# Altium PCB UWB_CAN_R3.PcbDoc
Units mm, origin at the board's own origin, x right, y up, seen from the top; angles counter-clockwise.
Board outline 30 x 20.03 mm, 4 copper layers (Component Side, 3V3, Signal, Solder Side), stack 1.782 mm thick; 60 components, 51 nets, 432 pads, 150 vias.
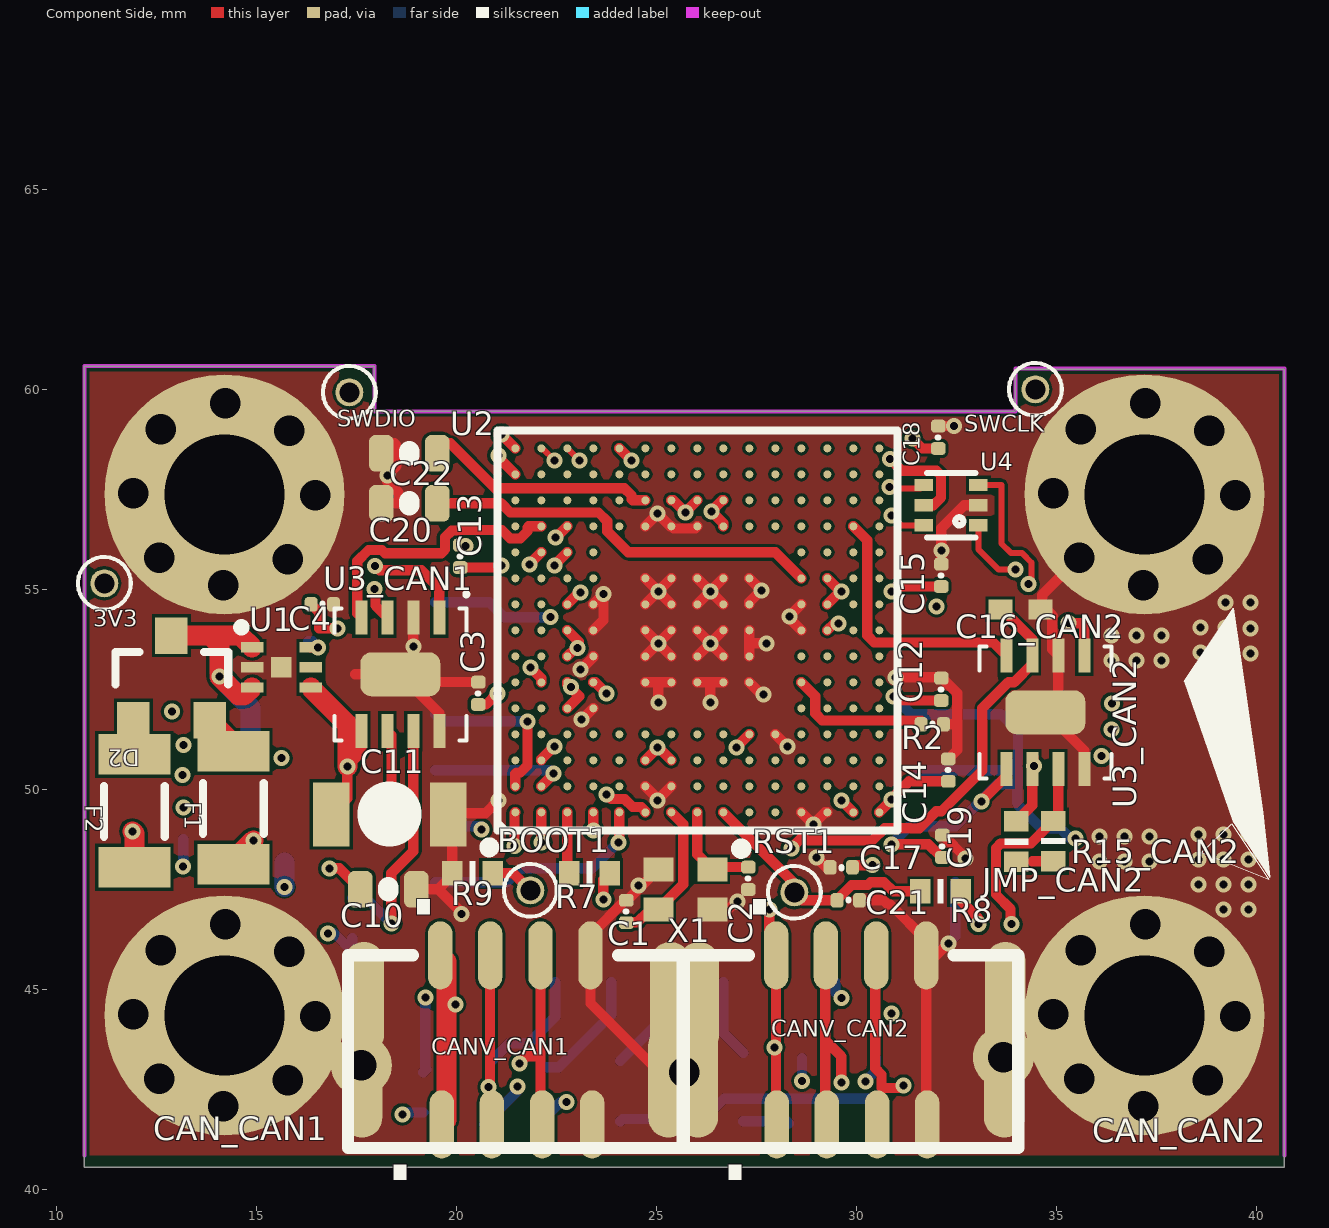
[diagram p0: Component Side view]
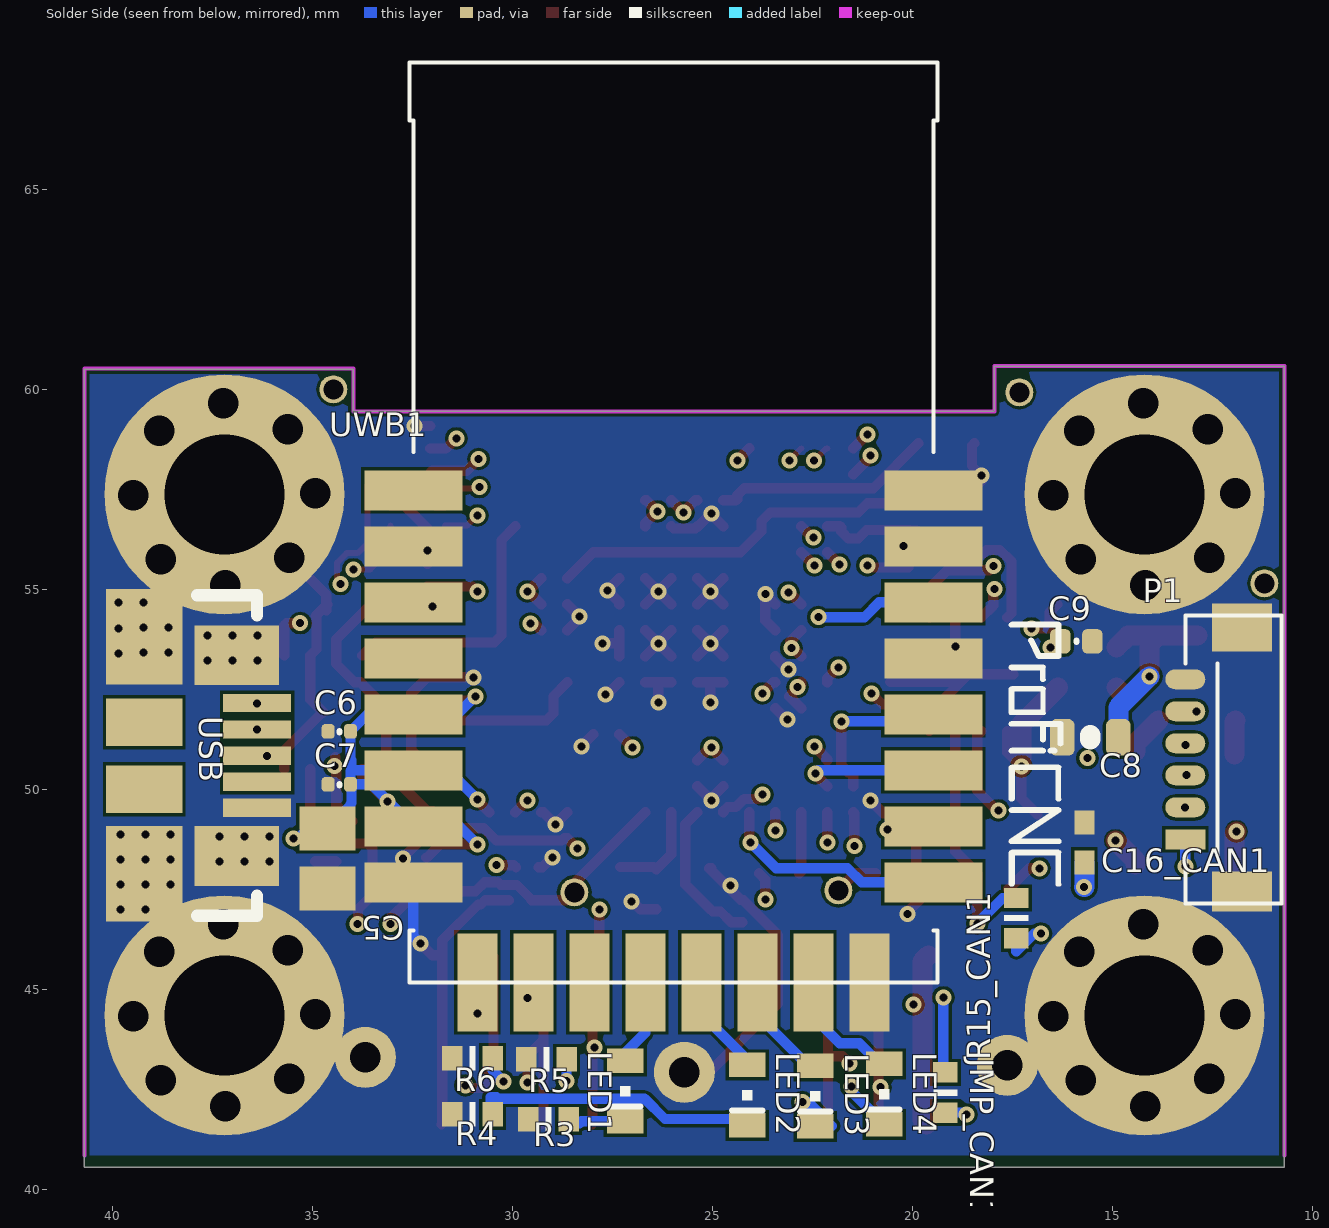
[diagram p1: Solder Side view, seen from below]
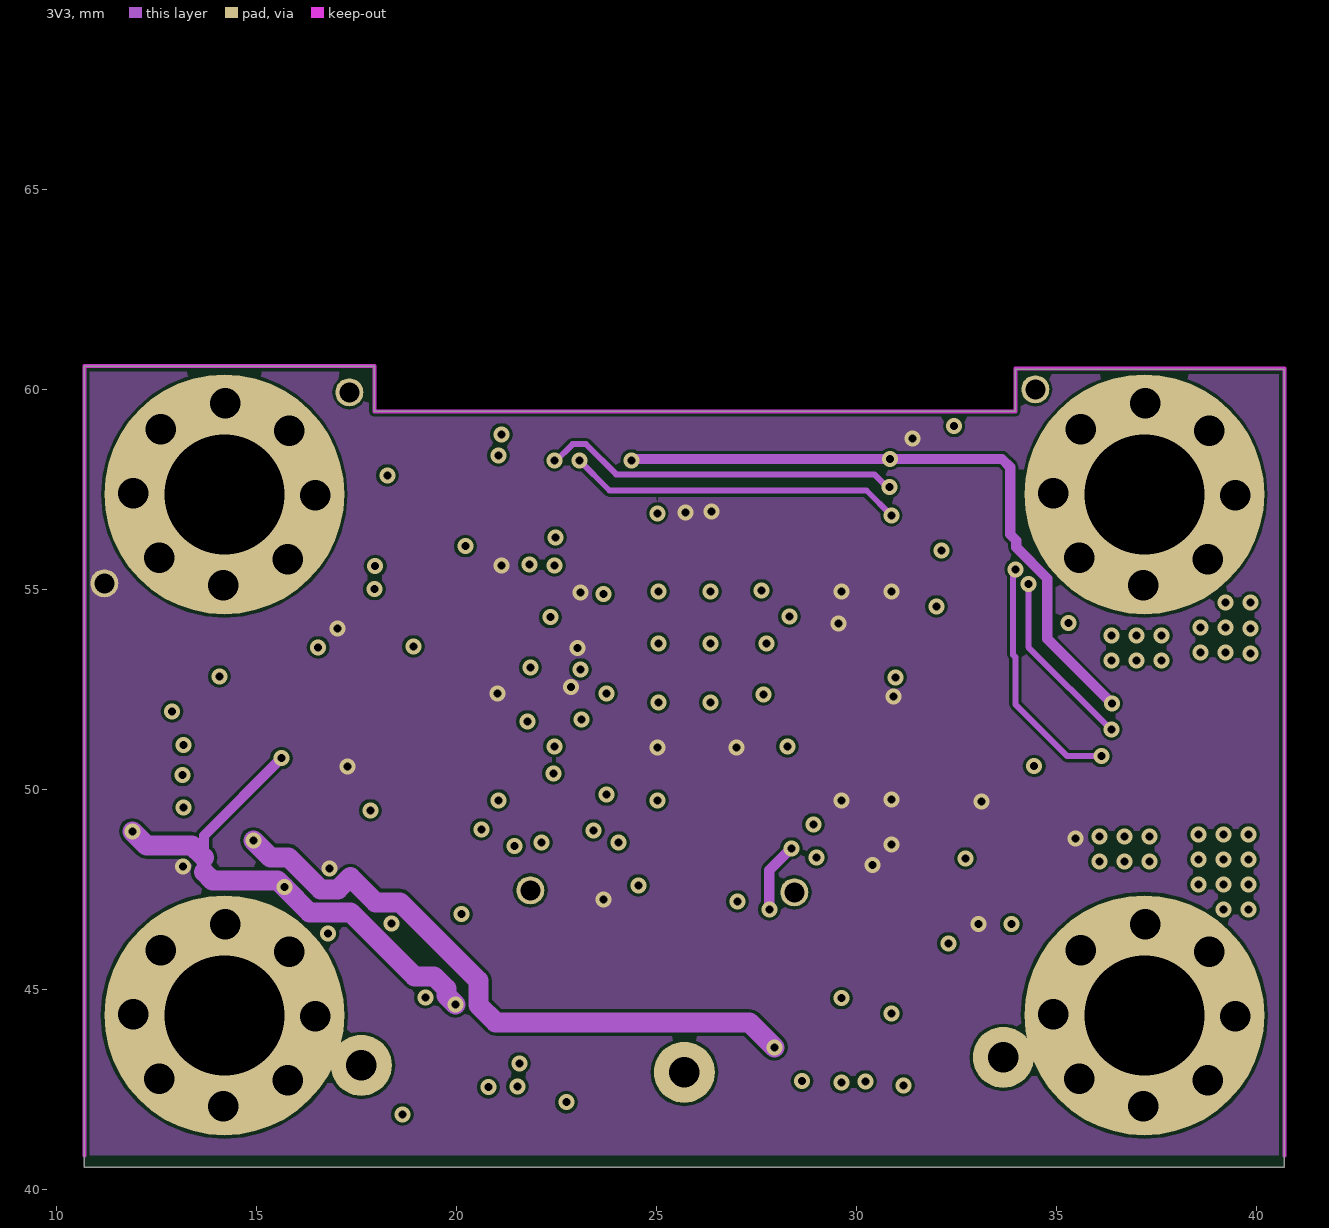
[diagram p2: 3V3]
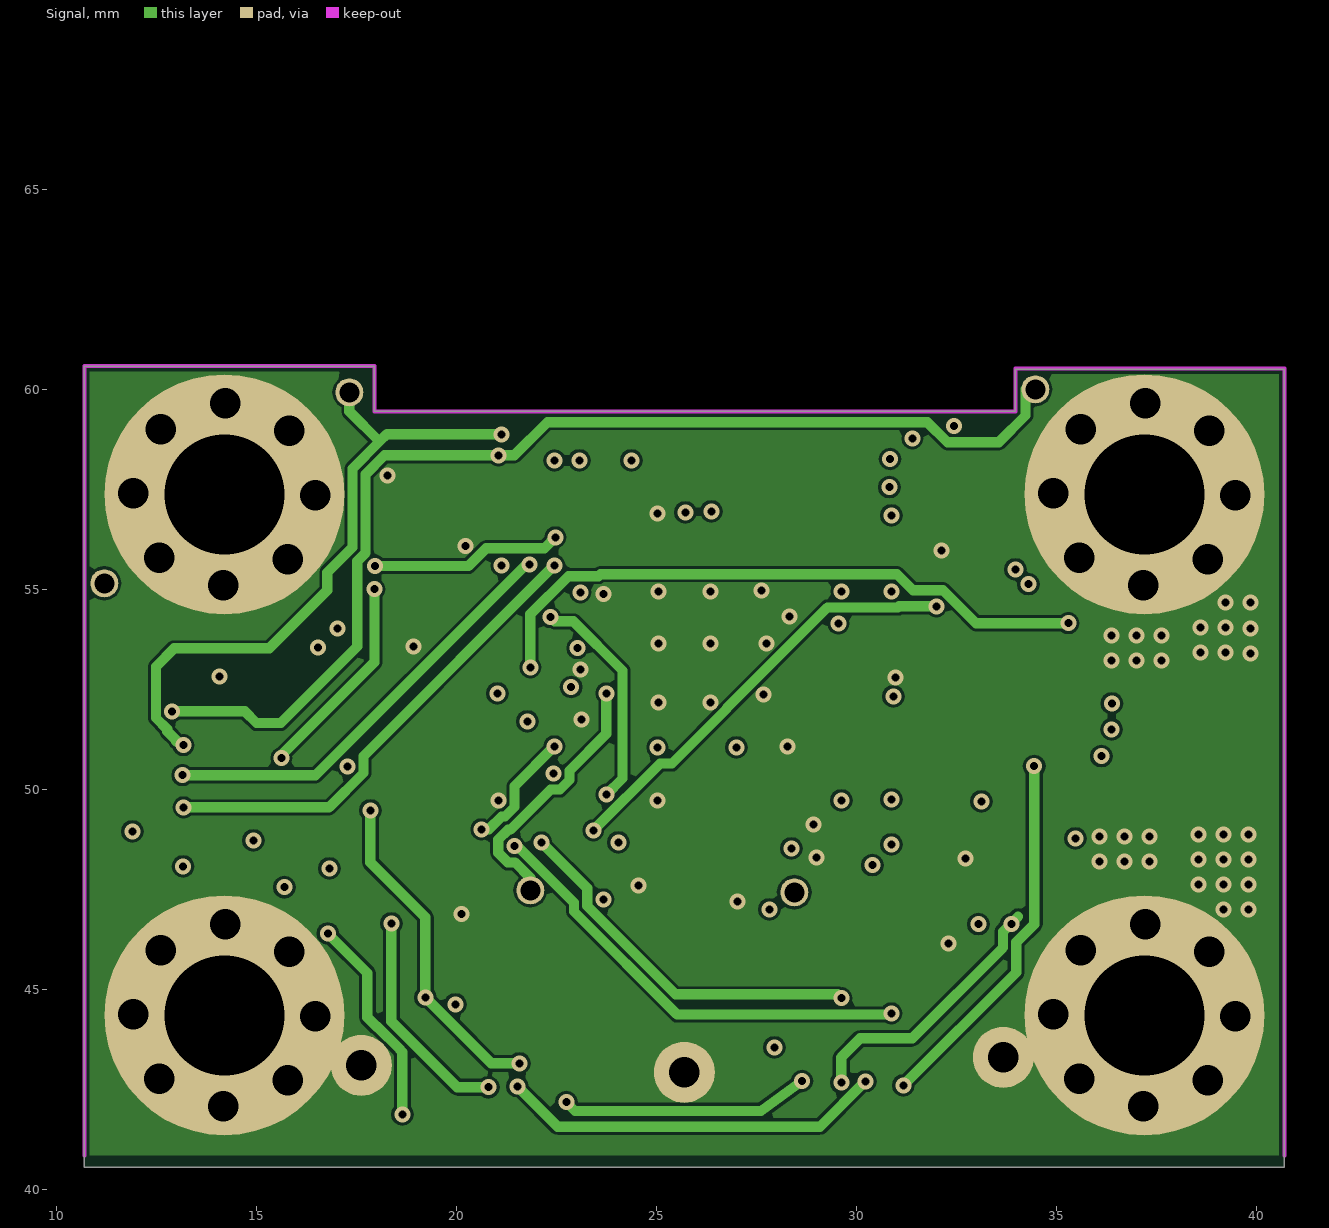
[diagram p3: Signal]
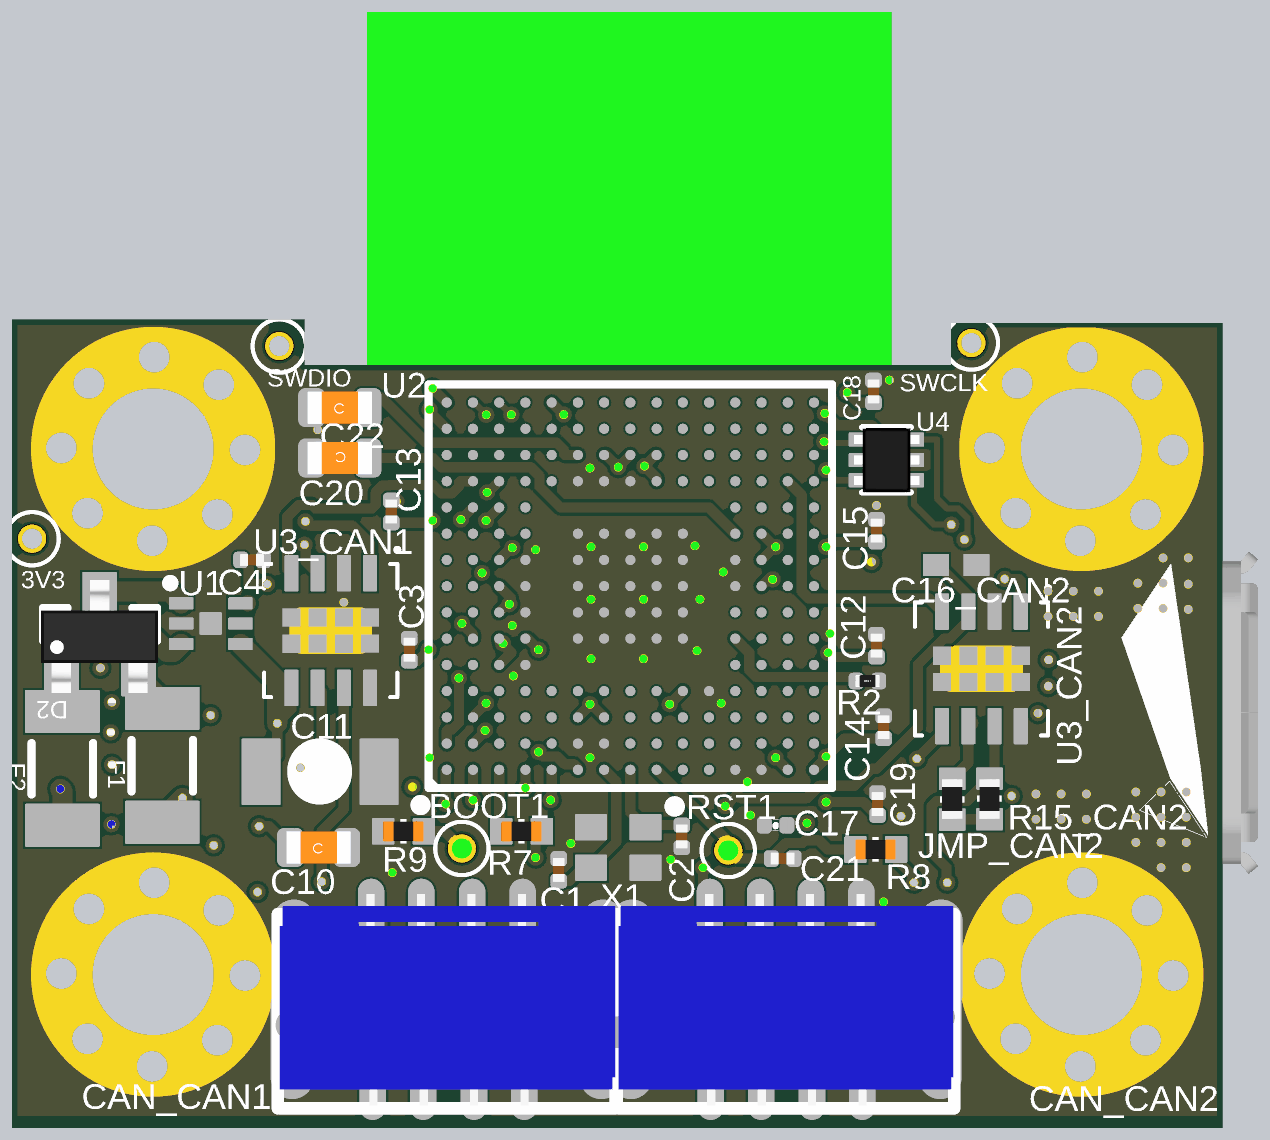
[diagram p4: 3D render of the assembled board from above, using the file's embedded part models]
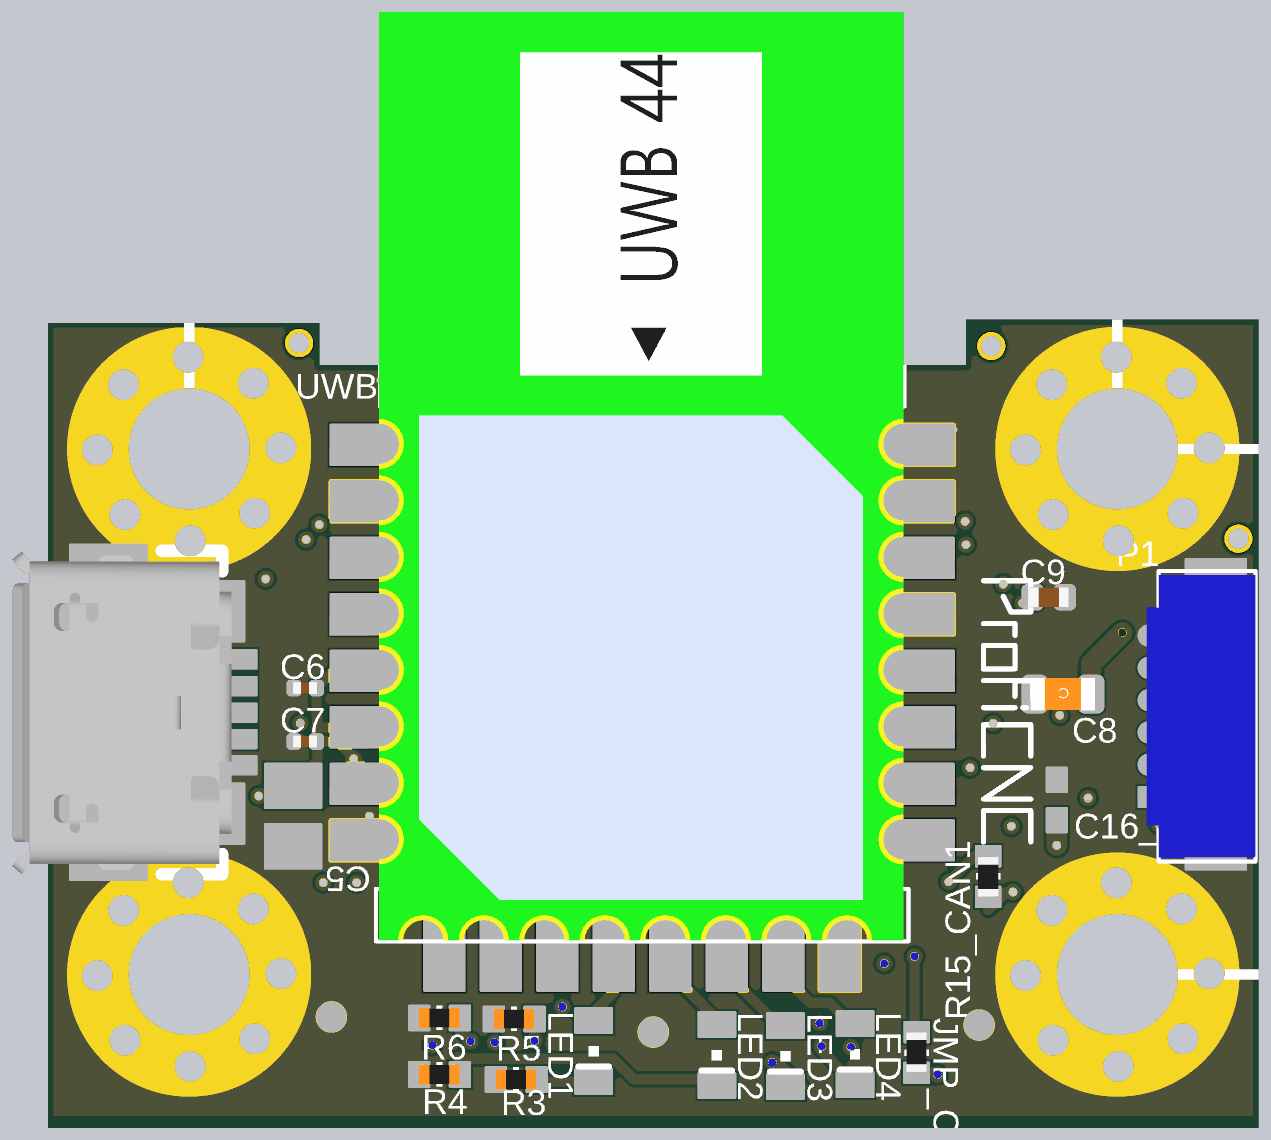
[diagram p5: 3D render of the assembled board from below, using the file's embedded part models]

## Layer stack, top to bottom
Top Solder: solder mask 0.0102, Solder Resist, Dk 3.5
Component Side: signal copper 0.0356
Dielectric 1: core 1, FR-4, Dk 4.2
3V3: signal copper 0.036
Dielectric2: dielectric 0.32, FR-4, Dk 4.8
Signal: signal copper 0.035
Dielectric3: dielectric 0.32, FR-4, Dk 4.8
Solder Side: signal copper 0.0356
Bottom Solder: solder mask 0.0102, Solder Resist, Dk 3.5

## Board outline
10.7,40.55 10.7,60.581 17.95,60.581 17.95,59.45 33.975,59.45 33.975,60.5 40.7,60.5 40.7,40.55

## Design rules (kind name [scope] priority, off if disabled: settings)
Clearance Clearance_1 [All] p1: gap=0.076 ignorepadtopadclearanceinfootprint=FALSE
Clearance mdPadVia [IsPad vs IsVia] p2 off: gap=0.15 ignorepadtopadclearanceinfootprint=FALSE except(0: Arc-Hole Track-Hole SMDPad-Hole THPad-Hole Via-Hole Fill-Hole Poly-Hole Region-Hole Text-Hole)
ComponentClearance ComponentClearance_1 [All] p1 off: gap=0 collisioncheckmode=3 verticalgap=0 showdistances=FALSE
DiffPairsRouting [All] p1: maxlimit=0.254 minlimit=0.254 mostfreqgap=0.254 toplayer_minwidth=0.15 toplayer_maxwidth=0.381 toplayer_prefwidth=0.15 midlayer1_minwidth=0.15 midlayer1_maxwidth=0.381 midlayer1_prefwidth=0.15 midlayer14_minwidth=0.15 midlayer14_maxwidth=0.381 midlayer14_prefwidth=0.15 bottomlayer_minwidth=0.15 bottomlayer_maxwidth=0.381 bottomlayer_prefwidth=0.15 maxuncoupledlength=12.7
HoleSize [All] p1: absolutevalues=TRUE maxlimit=5 minlimit=0.025 maxpercent=80.000 minpercent=20.000
HoleToHoleClearance [All] p1: gap=0.203 allowstackedmicrovias=TRUE
MatchedLengths [All] p1 off: tolerance=25.4 checknetsindiffpair=FALSE checkdiffpairvsdiffpair=TRUE checkxsignals=TRUE checkothers=TRUE
MinimumSolderMaskSliver [All] p1 off: minsoldermaskwidth=0.254
PasteMaskExpansion [All] p1: expansion=0.025
PolygonConnect ThermalVias [IsVia] p1: connectstyle=Direct reliefconductorwidth=0.254 reliefentries=4 polygonreliefangle="90 Angle" airgapwidth=0.254
PolygonConnect [All] p2: connectstyle=Direct reliefconductorwidth=0.254 reliefentries=4 polygonreliefangle="90 Angle" airgapwidth=0.254
RoutingVias 1-2 [InDrillLayerPair('Component Side - Signal Layer 1')] p1: holewidth=0.1 width=0.2 viastyle="Through Hole" minholewidth=0.1 minwidth=0.2 maxholewidth=0.1 maxwidth=0.2
RoutingVias 2-3 [InDrillLayerPair('Signal Layer 1 - Signal Layer 2')] p2: holewidth=0.1 width=0.2 viastyle="Through Hole" minholewidth=0.1 minwidth=0.2 maxholewidth=0.1 maxwidth=0.2
RoutingVias 3-4 [InDrillLayerPair('Signal Layer 2 - Solder Side')] p3: holewidth=0.1 width=0.2 viastyle="Through Hole" minholewidth=0.1 minwidth=0.2 maxholewidth=0.1 maxwidth=0.2
RoutingVias 1-4 [InDrillLayerPair('Component Side - Solder Side')] p4: holewidth=0.2 width=0.4 viastyle="Through Hole" minholewidth=0.2 minwidth=0.4 maxholewidth=0.2 maxwidth=0.4
SMDNeckDown SMDNeckDown1V8 [InNet('1V8')] p1 off: percent=70.000
SMDNeckDown SMDNeckDown2V8 [InNet('2V8')] p2 off: percent=70.000
SMDNeckDown 5VNeckdown [All] p3 off: percent=100.000
ShortCircuit normal_no_shorts [InPadClass('All Pads')] p1: allowed=FALSE
SilkToBoardRegionClearance [All] p1 off:
SilkToSilkClearance [All] p1 off: silktosilkclearance=0.254
SilkToSolderMaskClearance [IsPad] p1 off: minsilkscreentomaskgap=0.001 clearancetoexposedcopper=TRUE
SolderMaskExpansion [All] p1: expansion=0.025
Width 2V8 [InNet('1V8')] p1: maxlimit=0.254 minlimit=0.124 preferedwidth=0.254
Width 5V [InNet('Net3_1')] p2: maxlimit=0.254 minlimit=0.087 preferedwidth=0.254
Width 1V8 [InNet('2V8')] p3: maxlimit=0.254 minlimit=0.124 preferedwidth=0.254
Width [All] p4: maxlimit=0.5 minlimit=0.127 preferedwidth=0.254
20 further rules are at their usual default settings.

## Classes and differential pairs
channel class OMD_CAN_HORIZONTAL_dual: CAN1 CAN2
component class CAN2: C16_CAN2 CAN_CAN2 CANV_CAN2 JMP_CAN2 R15_CAN2 U3_CAN2
component class UWB_F4_CAN_UWB_layout_R2: USB
component class CAN1: C16_CAN1 CAN_CAN1 CANV_CAN1 JMP_CAN1 R15_CAN1 U3_CAN1
component class U_UWB_5V-3V3_LDO: C8 C9 C10 C11 D2 F1 F2 U1
component class U_OMD_UWB: C5 C6 C7 LED1 LED2 LED3 LED4 R3 R4 R5 R6 UWB1
component class U_UWB_F4_MCU: 3V3 BOOT1 C1 C1_2 C2 C2_2 C3 C3_2 C4 C12 C13 C14 C15 C17 C18 C19 C20 C21 C22 ICM-1_2 P1 R2 R7 R8 R9 RST1 SWCLK SWDIO U2 U4 X1
differential pair USB: +USB_P -USB_N
differential pair OTG_FS: +OTG_FS_P -OTG_FS_N

## Components (designator, comment, footprint, x,y, rotation, side; value= is the part's Value field where it differs from the comment)
3V3 "" PAD.04X.04#1 11.2,55.15 r90 top
BOOT1 "" PAD.04X.04#2 21.85,47.475 r90 top
C1 "8p" 0201-cap 24.25,46.945 r90 top
C2 "8p" 0201-cap 27.3,47.775 r90 top
C3 "0u1" 0201-cap 20.55,52.4 r90 top
C4 "0u1" 0201-cap 16.65,54.625 r0 top
C5 "GRM21BR60G107ME15L" C0805 34.625,48.275 r90 bottom value=100uF
C6 "1u" 0201-cap 34.325,51.45 r0 bottom
C7 "0u1" 0201-cap 34.325,50.125 r0 bottom
C8 "1u" 0603-CAP 15.55,51.3 r0 bottom
C9 "0.1u" 0402-CAP 15.9,53.7 r180 bottom
C10 "1u" 0603-CAP 18.3,47.5 r0 top
C11 "100u" 1206-CAP 18.325,49.375 r0 top
C12 "0u1" 0201-cap 32.125,52.5 r90 top
C13 "0u1" 0201-cap 20.1,55.825 r90 top
C14 "0u1" 0201-cap 32.3,50.48 r90 top
C15 "0u1" 0201-cap 32.125,55.35 r90 top
C16_CAN1 "Cap" CAPC1005L 15.7,48.675 r270 bottom value=1uF (schematic designator C16)
C16_CAN2 "Cap" CAPC1005L 34.1,54.5 r180 top value=1uF (schematic designator C16)
C17 "0u1" 0201-cap 29.625,48.05 r180 top
C18 "0u1" 0201-cap 32.05,58.8 r90 top
C19 "0u1" 0201-cap 32.15,48.575 r90 top
C20 "2u2" 0603-CAP 18.825,57.15 r180 top
C21 "0u1" 0201-cap 29.8,47.225 r0 top
C22 "2u2" 0603-CAP 18.825,58.4 r0 top
CAN_CAN1 "JST_GH_H4" JST_GH_H4 21.48,40.4 r180 top (schematic designator CAN)
CAN_CAN2 "JST_GH_H4" JST_GH_H4 29.875,40.4 r180 top (schematic designator CAN)
CANV_CAN1 "JST_GH_V4" JST_GH_V4 21.515,47.075 r0 top (schematic designator CANV)
CANV_CAN2 "JST_GH_V4" JST_GH_V4 29.89,47.075 r0 top (schematic designator CANV)
D2 "PMEG2005CT" SOT23-3 12.875,52.725 r0 top value=20V
F1 "0ZCA0035FF2G" PTC-1206 14.425,49.525 r90 top value=0.35A
F2 "0ZCA0035FF2G" PTC-1206 11.95,49.45 r90 top value=0.35A
JMP_CAN1 "solder" R0402 19.175,42.425 r270 bottom (schematic designator JMP)
JMP_CAN2 "solder" R0402 34,48.7 r270 top (schematic designator JMP)
LED1 "AMBER" 0603-LED 27.175,42.45 r90 bottom
LED2 "AMBER" 0603-LED 24.125,42.35 r90 bottom
LED3 "AMBER" 0603-LED 22.425,42.325 r90 bottom
LED4 "AMBER" 0603-LED 20.7,42.375 r90 bottom
P1 "JST_SUR_6" JST_SUR_H6 11.175,50.75 r90 bottom
R2 "10K" 0201-RES 31.9,51.625 r0 top
R3 "220R" 0402-RES 29.1,41.75 r180 bottom
R4 "220R" 0402-RES 31,41.875 r180 bottom
R5 "220R" 0402-RES 29.15,43.25 r180 bottom
R6 "220R" 0402-RES 31,43.275 r180 bottom
R7 "1K" 0402-RES 23.325,47.9 r0 top
R8 "10K" 0402-RES 32.1,47.45 r0 top
R9 "10K" 0402-RES 20.4,47.9 r0 top
R15_CAN1 "RES SMD 120 OHM 5% 1/16W 0402" R0402 17.4,46.775 r90 bottom value=120R (schematic designator R15)
R15_CAN2 "RES SMD 120 OHM 5% 1/16W 0402" R0402 34.925,48.7 r90 top value=120R (schematic designator R15)
RST1 "" PAD.04X.04#2 28.45,47.425 r90 top
SWCLK "" PAD.04X.04#1 34.475,60 r90 top
SWDIO "" PAD.04X.04#1 17.325,59.925 r90 top
U1 "MIC5353" MLF-6-1.6MM 15.625,53.05 r270 top
U2 "STM32F427IIH7" STM-UFBGA176+25 26.025,53.975 r90 top
U3_CAN1 "CAN" SON65P300X100_HS-9N 18.6,52.875 r270 top (schematic designator U3)
U3_CAN2 "CAN" SON65P300X100_HS-9N 34.725,51.925 r270 top (schematic designator U3)
U4 "NUF2042XV6" SOT563-6 32.375,57.1 r90 top
USB "47346-0001" MOLEX-47346-0001 39.2,50.837 r180 bottom
UWB1 "DWM1000" DWM1000 25.975,56.675 r180 bottom
X1 "Crystal Oscillator in SMD 1.6 x 1.2" OSCILLATOR-1.6x1.2 25.725,47.5 r180 top

## Footprints (in the part's own frame and the unit in brackets; to place one, negate y for a bottom-side part, rotate by r counter-clockwise, add the part's x,y. Pads: shape width x height; smd on the part's side, far side on the other; paste and mask are expansions set on the pad)
0201-cap [mm]
  rrect50% 0.32x0.36 smd mask+0: 1(-0.28,0) 2(0.28,0)
  silkscreen extent 0,-0.01 0,0.03, body extent -0.3,-0.15 0.3,0.15, height 0.3
0201-RES [mm]
  rrect50% 0.32x0.36 smd mask+0: 1(-0.28,0) 2(0.28,0)
  silkscreen extent 0,-0.01 0,0.03, body extent -0.3,-0.15 0.3,0.15, height 0.12
0402-CAP [mil]
  rrect50% 20x24 smd mask+0: 1(-15.75,0) 2(15.75,0)
  silkscreen extent 0,0 0,1, body extent -20,-10 20,10, height 20
0402-RES [mil] "0402-RES"
  rect 20x24 smd: 1(-19.68,0) 2(20,0)
  silkscreen extent -3,-12 3,12, body extent -20,-10 20,10, height 20
0603-CAP [mil] "0603-CAP"
  rrect50% 24x36 smd mask+0: 1(-27.56,0) 2(27.56,0)
  silkscreen extent 0,-2 0,2, body extent -31,-16 31,16, height 34
0603-LED [mil]
  rect 24x36 smd: A(30,0) C(-29.53,0)
  silkscreen extent -15,-15 5,15
1206-CAP [mil] "1206-CAP"
  rect 36x63 smd: 1(-57.09,0) 2(58,0)
  silkscreen extent 0,0 0,1
C0805 [mm] "Chip Capacitor, Body 2.0x1.3mm, IPC High Density"
  rect 1.1x1.4 smd: 1(-0.75,0) 2(0.75,0)
  body extent -1.1,-0.72 1.1,0.72, height 1.4
CAPC1005L [mm] "Chip Capacitor, Body 1.0x0.5mm, IPC High Density"
  rect 0.6x0.5 smd: 1(-0.5,0) 2(0.5,0)
  body extent -0.55,-0.3 0.55,0.3, height 0.6
DWM1000 [mm] "DWM1000"
  rect 2.45x1 smd mask+0.05: 1(-6.5,0.8) 2(-6.5,-0.6) 3(-6.5,-2) 4(-6.5,-3.4) 5(-6.5,-4.8) 6(-6.5,-6.2) 7(-6.5,-7.6) 8(-6.5,-9) 17(6.5,-9) 18(6.5,-7.6) 19(6.5,-6.2) 20(6.5,-4.8) 21(6.5,-3.4) 22(6.5,-2) 23(6.5,-0.6) 24(6.5,0.8)
  rect 1x2.45 smd mask+0.05: 9(-4.9,-11.5) 10(-3.5,-11.5) 11(-2.1,-11.5) 12(-0.7,-11.5) 13(0.7,-11.5) 14(2.1,-11.5) 15(3.5,-11.5) 16(4.9,-11.5)
  silkscreen extent -6.6,-11.5 6.6,11.5, body extent -6.52,-11.47 6.48,11.53
JST_GH_H4 [mil]
  rrect100% 24x67 smd: 1(74,-214.57) 2(25,-214.57) 3(-24.61,-214.57) 4(-73.82,-214.57)
  rrect100% 40x111 smd: GND(-150.59,-90.55) GND(151,-90.55)
  silkscreen extent -164,-215 165,-25, body extent -162,-234 163,-43, height 170
JST_GH_V4 [mil]
  rrect100% 24x67 smd: 1(-73.82,-214.57) 2(-24.61,-214.57) 3(25,-214.57) 4(74,-214.57)
  rrect100% 40x111 smd: GND(-150.59,-90.55) GND(151,-90.55)
  body extent -162,-235 163,-40, height 165
JST_SUR_H6 [mm]
  rect 0.5x1 smd: 1(-2,2)
  rrect100% 0.5x1 smd: 2(-1.2,2) 3(-0.4,2) 4(0.4,2) 5(1.2,2) 6(2,2)
  rect 1x1.5 smd: GND(-3.3,0.585)
  rect 1.2x1.5 smd: GND(3.3,0.585)
  silkscreen extent -3.6,-0.4 3.6,2, body extent -3.5,-0.4 3.5,2.3, height 1.7
MLF-6-1.6MM [mil] "MLF-6-1.6MM"
  rect 10x22 smd: 1(-19.68,-28.74) 2(0,-28.74) 3(20,-28.74) 4(20,29) 5(0,29) 6(-19.68,29)
  rect 20x20 smd: 2(0,0)
  silkscreen extent -41,-41 -37,-37
MOLEX-47346-0001 [mil]
  rect 67x18 smd: D+(111,0) D-(111,26) GND(111,-51.18) ID(111,-25.59) VBUS(111,52)
  rect 75x94 smd: GND1(0,117) GND4(0,-116.14)
  rect 83x59 smd: GND2(91,99) GND3(91,-98.43)
  rect 75x47 smd: GND5(0,-32.97) GND6(0,33)
  silkscreen extent 52,-157 111,158, body extent -94,-157 120,157, height 107
OSCILLATOR-1.6x1.2 [mm] "OSCILLATOR-1.6x1.2"
  rect 0.75x0.6 smd: 1(-0.675,-0.5) 2(0.675,-0.5) 3(0.675,0.5) 4(-0.675,0.5)
  silkscreen extent -1.5,-1.12 -1.3,-0.91
PAD.04X.04#1 [mm]
  rrect100% 0.7x0.7 hole 0.5 paste-2: 1(0,0)
  silkscreen extent -0.66,-0.66 0.66,0.66
PAD.04X.04#2 [mm]
  rrect100% 0.7x0.7 hole 0.5 paste-2 mask+0.025: 1(0,0)
  silkscreen extent -0.66,-0.66 0.66,0.66
PTC-1206 [mil] "PTC-1206"
  rect 40x71 smd: 1(-55.12,0) 2(56,0)
  silkscreen extent -25,-30 25,30, body extent -60,-30 65,30, height 20
R0402 [mil]
  rect 20x24 smd: 1(-19.69,0) 2(20,0)
  silkscreen extent -3,-12 3,12, body extent -20,-10 20,10, height 12
SON65P300X100_HS-9N [mm] "SON, 8-Leads, Body 3.00x3.00mm, Pitch 0.65mm, Thermal Pad 2.40x1.59mm, IPC Medium Density"
  rect 0.85x0.3 smd: 1(-1.42,0.975) 2(-1.42,0.325) 3(-1.42,-0.325) 4(-1.42,-0.975) 5(1.42,-0.975) 6(1.42,-0.325) 7(1.42,0.325) 8(1.42,0.975)
  rrect50% 1.1x2 smd paste-0.795: 2(0,0)
  silkscreen extent -2.05,-1.65 1.65,1.7, body extent -1.55,-1.55 1.55,1.55, height 1
SOT23-3 [mil] "SOT23-3"
  rect 32x36 smd: 1(-37.4,-39.37) 2(38,-39.37) 3(0,44)
  silkscreen extent -55,-4 56,28, body extent -57,-55 57,55, height 51
SOT563-6 [mil] "SOT563-6"
  rect 12x18 smd: 1(-19.68,-26.57) 2(0,-26.57) 3(20,-26.57) 4(20,27) 5(0,27) 6(-19.68,27)
  silkscreen extent -31,-24 32,24, body extent -32,-32 31,32, height 23
STM-UFBGA176+25 [mm] "BGA, 201-Balls, Body 10x10mm, Pitch 0.65mm"
  round 0.2 smd: A1(-4.55,4.55) A2(-3.9,4.55) A3(-3.25,4.55) A4(-2.6,4.55) A5(-1.95,4.55) A6(-1.3,4.55) A7(-0.65,4.55) A8(0,4.55) A9(0.65,4.55) A10(1.3,4.55) A11(1.95,4.55) A12(2.6,4.55) A13(3.25,4.55) A14(3.9,4.55) A15(4.55,4.55) B1(-4.55,3.9) B2(-3.9,3.9) B3(-3.25,3.9) B4(-2.6,3.9) B5(-1.95,3.9) B6(-1.3,3.9) B7(-0.65,3.9) B8(0,3.9) B9(0.65,3.9) B10(1.3,3.9) B11(1.95,3.9) B12(2.6,3.9) B13(3.25,3.9) B14(3.9,3.9) B15(4.55,3.9) C1(-4.55,3.25) C2(-3.9,3.25) C3(-3.25,3.25) C4(-2.6,3.25) C5(-1.95,3.25) C6(-1.3,3.25) C7(-0.65,3.25) C8(0,3.25) C9(0.65,3.25) C10(1.3,3.25) C11(1.95,3.25) C12(2.6,3.25) C13(3.25,3.25) C14(3.9,3.25) C15(4.55,3.25) D1(-4.55,2.6) D2(-3.9,2.6) D3(-3.25,2.6) D4(-2.6,2.6) D5(-1.95,2.6) D6(-1.3,2.6) D7(-0.65,2.6) D8(0,2.6) D9(0.65,2.6) D10(1.3,2.6) D11(1.95,2.6) D12(2.6,2.6) D13(3.25,2.6) D14(3.9,2.6) D15(4.55,2.6) E1(-4.55,1.95) E2(-3.9,1.95) E3(-3.25,1.95) E4(-2.6,1.95) E12(2.6,1.95) E13(3.25,1.95) E14(3.9,1.95) E15(4.55,1.95) F1(-4.55,1.3) F2(-3.9,1.3) F3(-3.25,1.3) F4(-2.6,1.3) F6(-1.3,1.3) F7(-0.65,1.3) F8(0,1.3) F9(0.65,1.3) F10(1.3,1.3) F12(2.6,1.3) F13(3.25,1.3) F14(3.9,1.3) F15(4.55,1.3) G1(-4.55,0.65) G2(-3.9,0.65) G3(-3.25,0.65) G4(-2.6,0.65) G6(-1.3,0.65) G7(-0.65,0.65) G8(0,0.65) G9(0.65,0.65) G10(1.3,0.65) G12(2.6,0.65) G13(3.25,0.65) G14(3.9,0.65) G15(4.55,0.65) H1(-4.55,0) H2(-3.9,0) H3(-3.25,0) H4(-2.6,0) H6(-1.3,0) H7(-0.65,0) H8(0,0) H9(0.65,0) H10(1.3,0) H12(2.6,0) H13(3.25,0) H14(3.9,0) H15(4.55,0) J1(-4.55,-0.65) J2(-3.9,-0.65) J3(-3.25,-0.65) J4(-2.6,-0.65) J6(-1.3,-0.65) J7(-0.65,-0.65) J8(0,-0.65) J9(0.65,-0.65) J10(1.3,-0.65) J12(2.6,-0.65) J13(3.25,-0.65) J14(3.9,-0.65) J15(4.55,-0.65) K1(-4.55,-1.3) K2(-3.9,-1.3) K3(-3.25,-1.3) K4(-2.6,-1.3) K6(-1.3,-1.3) K7(-0.65,-1.3) K8(0,-1.3) K9(0.65,-1.3) K10(1.3,-1.3) K12(2.6,-1.3) K13(3.25,-1.3) K14(3.9,-1.3) K15(4.55,-1.3) L1(-4.55,-1.95) L2(-3.9,-1.95) L3(-3.25,-1.95) L4(-2.6,-1.95) L12(2.6,-1.95) L13(3.25,-1.95) L14(3.9,-1.95) L15(4.55,-1.95) M1(-4.55,-2.6) M2(-3.9,-2.6) M3(-3.25,-2.6) M4(-2.6,-2.6) M5(-1.95,-2.6) M6(-1.3,-2.6) M7(-0.65,-2.6) M8(0,-2.6) M9(0.65,-2.6) M10(1.3,-2.6) M11(1.95,-2.6) M12(2.6,-2.6) M13(3.25,-2.6) M14(3.9,-2.6) M15(4.55,-2.6) N1(-4.55,-3.25) N2(-3.9,-3.25) N3(-3.25,-3.25) N4(-2.6,-3.25) N5(-1.95,-3.25) N6(-1.3,-3.25) N7(-0.65,-3.25) N8(0,-3.25) N9(0.65,-3.25) N10(1.3,-3.25) N11(1.95,-3.25) N12(2.6,-3.25) N13(3.25,-3.25) N14(3.9,-3.25) N15(4.55,-3.25) P1(-4.55,-3.9) P2(-3.9,-3.9) P3(-3.25,-3.9) P4(-2.6,-3.9) P5(-1.95,-3.9) P6(-1.3,-3.9) P7(-0.65,-3.9) P8(0,-3.9) P9(0.65,-3.9) P10(1.3,-3.9) P11(1.95,-3.9) P12(2.6,-3.9) P13(3.25,-3.9) P14(3.9,-3.9) P15(4.55,-3.9) R1(-4.55,-4.55) R2(-3.9,-4.55) R3(-3.25,-4.55) R4(-2.6,-4.55) R5(-1.95,-4.55) R6(-1.3,-4.55) R7(-0.65,-4.55) R8(0,-4.55) R9(0.65,-4.55) R10(1.3,-4.55) R11(1.95,-4.55) R12(2.6,-4.55) R13(3.25,-4.55) R14(3.9,-4.55) R15(4.55,-4.55)
  silkscreen extent -5.55,-5 5,5.32, body extent -5,-5 5,5, height 0.6

## Part data
3V3 BOOT1 RST1 SWCLK SWDIO: library part PAD.04, Manufacturer 1=DNF, Supplier 1=DNF, Supplier Part Number 1=DNF, Supplier Unit Price 1=0
C1 C2: library part CAP0402, "CAP CER 8PF 50V NP0 0201", Supplier Part Number 1=490-13331-1-ND, Supplier 1=Digi-Key
C3 C4 C12 C13 C14 C15 C17 C18 C19 C21: library part CAP0402, "CAP CER 0.1UF 6V Y5V 0201", Supplier Part Number 1=490-10404-2-ND, Supplier 1=Digi-Key
C5: library part Capacitor, Supplier Part Number 1=490-10510-1-ND, Supplier 1=Digi-Key
C6: library part CAP0603, "CAP CER 1UF 6.3V X5R 0201", Supplier Part Number 1=490-7229-2-ND, Supplier 1=Digi-Key
C7: library part CAP0402, "CAP CER 0.1UF 16V Y5V 0402", Supplier Part Number 1=490-10404-2-ND, Supplier 1=Digi-Key
C8 C10: library part CAPACITOR-0603, PARTNO=LMK107B7105KA-T, Supplier Part Number 1=587-3766-1-ND, DOC_NUM=1, REV=X2, Supplier 1=Digi-Key, YEAR=2014
C9: library part CAPACITOR-0402, PARTNO=LMK105BJ104KV-F, Supplier Part Number 1=311-1047-2-ND, DOC_NUM=1, REV=X2, Supplier 1=Digi-Key, YEAR=2014
C11: library part CAPACITOR-1206, PARTNO=C3216X5R1A107M160AC, Supplier Part Number 1=445-6007-2-ND, DOC_NUM=1, REV=X2, Supplier 1=Digi-Key, YEAR=2014
C16_CAN1 C16_CAN2: "CAP CER 1UF 6.3V X5R 0402", Supplier Part Number 1=587-3766-1-ND, Supplier 1=Digi-Key
C20: library part CAP0603, Supplier Part Number 1=445-7438-1-ND, Supplier 1=Digi-Key
C22: library part CAP0603, Supplier Part Number 1=445-7438-6-ND, Supplier 1=Digi-Key
CAN_CAN1 CAN_CAN2: "SM04B-GHS-TB", Supplier Part Number 1=455-1566-2-ND, Supplier 1=Digi-Key
CANV_CAN1 CANV_CAN2: "BM04B-GHS-TBT", Supplier Part Number 1=455-1580-2-ND, Supplier 1=Digi-Key
D2: "DIODE SCHOTTKY 20V 500MA TO236AB", Supplier Part Number 1=568-6500-1-ND, Supplier 1=Digi-Key
F1 F2: library part PTCSMD, "PTC RESTTBLE 0.35A 16V CHIP 1206", Supplier Part Number 1=507-1479-1-ND, Supplier 1=Digi-Key
JMP_CAN1 JMP_CAN2: library part Resistor
LED1 LED2 LED3 LED4: library part LED0603, "LED 1.6X0.8 DOME ORN CLEAR SMD", Supplier Part Number 1=754-1802-1-ND, Supplier 1=Digi-Key
P1: "Connector, Header, 6Pos, .8mm IDC, R/A, SMD, Tin", Supplier Part Number 1=SM06B-SURS-TF(LF)(SN)-ND, Supplier 1=Digi-Key
R2: library part RESISTOR0402-RES, "RES 10K OHM 1% 0201 SMD", Supplier Part Number 1=P15980TR-ND, Supplier 1=Digi-Key
R3 R4 R5 R6: library part RESISTOR0402-RES, "RES 220 OHM 1/16W 1% 0402 SMD", Supplier Part Number 1=311-220LRCT-ND, Supplier 1=Digi-Key
R7: library part RESISTOR0402-RES, Supplier Part Number 1=311-1.00KLRCT-ND, Supplier 1=Digi-Key
R8 R9: library part RESISTOR0402-RES, Supplier Part Number 1=311-10.0KLRCT-ND, Supplier 1=Digi-Key
R15_CAN1 R15_CAN2: library part Resistor, Supplier Part Number 1=311-120JRTR-ND, Supplier 1=Digi-Key
U1: "MIC5353 - 500mA LDO in 1.6mm × 1.6mm Package   The MIC5353 is a high-performance, single-output, ultra- low LDO (ULDOTM) regulator, offering a low total output noise of 30µVRMS. The MIC5353 is capable of sourcing 500mA output current and offers high-PSRR and low- output noise, making it an ideal solution for RF applications.   The MIC5353 provides 2% accuracy, extremely low dropout voltage (160mV @ 500mA), and low ground current (typically 90µA) making it ideal for battery-operated applications. When disabled, the MIC5353 enters a zero- off-mode current state, thereby drawing almost no current.   The MIC5353 is available in the 1.6mm x 1.6mm Thin MLF® package, occupying only 2.56mm2 of PCB area, a 36% reduction in board area compared to SC-70 and 2mm x 2mm Thin MLF® packages.", Supplier Part Number 1=576-3680-1-ND, Supplier 1=Digi-Key
U2: "ARM Cortex-M4 32-bit MCU+FPU, 210 DMIPS, 2048 kB Flash, 256 kB Internal RAM, 140 I/Os, 176-pin UFBGA, -40 to 105 degC, Tray", Supplier Part Number 1=2393651, Supplier 1=Farnell
U3_CAN1 U3_CAN2: Supplier Part Number 1=568-8686-2-ND, Supplier 1=Digi-Key
U4: "IC FILTER USB ESD PROTECT SOT363", Supplier Part Number 1=NUF2042XV6T1GOSDKR-ND, Supplier 1=Digi-Key
USB: library part MOLEX-47346-0001, "MICRO USB B, BOTTOM MOUNT", Supplier 1=Digi-Key
UWB1: Supplier Part Number 1=1479-1002-2-ND, Supplier 1=Digi-Key
X1: library part OSCILLATOR-3.2X2.5, "CRYSTAL 24MHZ 8PF SMD", Supplier Part Number 1=887-1846-2-ND, Supplier 1=Digi-Key

## Free pads (board coordinates)
  round 6 hole 3: 1(14.2,44.35) 1(14.2,57.375) 1(37.2,44.35) 1(37.2,57.375)
  round 1.524 hole 0.762 mask+0.025: 2(17.625,43.1) 3(25.7,42.925) 4(33.675,43.3)
  round 0.76 hole 0.762: 9(11.925,44.375) 9(11.925,57.4) 9(12.574,42.759) 9(12.574,55.784) 9(12.609,45.976) 9(12.609,59.001) 9(14.175,42.075) 9(14.175,55.1) 9(14.225,46.625) 9(14.225,59.65) 9(15.791,42.724) 9(15.791,55.749) 9(15.826,45.941) 9(15.826,58.966) 9(16.475,44.325) 9(16.475,57.35) 9(34.925,44.375) 9(34.925,57.4) 9(35.574,42.759) 9(35.574,55.784) 9(35.609,45.976) 9(35.609,59.001) 9(37.175,42.075) 9(37.175,55.1) 9(37.225,46.625) 9(37.225,59.65) 9(38.791,42.724) 9(38.791,55.749) 9(38.826,45.941) 9(38.826,58.966) 9(39.475,44.325) 9(39.475,57.35)

## Via types
v1: diameter 0.4, hole 0.2, Component Side to Solder Side, 150 vias

## Nets (pads, with @x,y where several pads share a name; then routed paths per layer and width w, separated by ;. In a path a pad name is that pad's centre, name@x,y a point inside that pad or via, vN(x,y) a via of type N, cw(c..) or ccw(c..) an arc to the next point about the centre after c; other vN are vias at no path point)
CAN2_RX: U2.P12 U3_CAN2.4 | length 6.6
  Component Side w0.254: U2.P12 30.272,56.228 30.272,53.849 30.449,53.672 33.423,53.672 U3_CAN2.4
CAN2_TX: U2.B6 U3_CAN2.1 | length 17.4
  Component Side w0.254: v1(21.85,53.05) 22.125,52.775 U2.B6 ; v1(35.302,54.153) 35.647,54.153 35.7,54.1 U3_CAN2.1
  Signal w0.254: v1(21.85,53.05) 21.85,54.375 22.803,55.328 23.556,55.328 23.606,55.378 31.017,55.378 31.417,54.978 32.167,54.978 32.993,54.153 v1(35.302,54.153)
FMU-BOOT0: BOOT1.1 R9.2 U2.D6 | length 8.2
  Component Side w0.254: R9.2 21.425,47.9 BOOT1.1 ; U2.D6 23.475,52.675 v1(23.75,52.4)
  Signal w0.254: BOOT1.1 21.85,47.79 21.466,48.174 21.284,48.174 21.048,48.41 21.048,48.744 21.295,48.992 21.354,48.992 22.359,49.997 22.592,49.997 22.828,50.233 22.828,50.466 23.75,51.388 v1(23.75,52.4)
FMU-SWCLK: P1.5 SWCLK.1 U2.A14 | length 29
  Component Side w0.254: v1(21.05,58.35) 21.05,58.3 U2.A14
  Signal w0.254: v1(12.893,51.95) 14.713,51.95 15.004,51.659 15.612,51.659 17.522,53.569 17.522,55.7 17.733,55.911 17.733,57.879 18.205,58.35 v1(21.05,58.35) 21.45,58.35 22.278,59.178 31.777,59.178 32.278,58.677 33.56,58.677 34.228,59.345 34.228,60 SWCLK.1
FMU-SWDIO: P1.4 SWDIO.1 U2.A15 | length 16.8
  Component Side w0.254: v1(21.125,58.875) U2.A15
  Signal w0.254: 13,51.2 13,51.225 ; v1(13.176,51.102) 13.123,51.102 13,51.225 ; SWDIO.1 17.325,59.45 18.081,58.694 ; v1(21.125,58.875) 18.263,58.875 18.081,58.694 ; 13,51.225 12.772,51.453 12.772,51.501 12.49,51.783 12.49,53.065 12.95,53.525 15.325,53.525 16.775,54.975 16.775,55.42 17.403,56.048 17.403,58.015 18.081,58.694
GND_MCU: C1.2 C2.1 C3.2 C4.2 C5.1 C6.2 C7.2 C8.2 C9.2 C10.2 C11.2 C12.2 C13.2 C14.2 C15.2 C16_CAN1.1 C16_CAN2.1 C17.2 C18.2 C19.2 C20.2 C21.2 C22.1 CAN_CAN1.4 CAN_CAN1.GND CAN_CAN2.4 CAN_CAN2.GND CANV_CAN1.4 CANV_CAN1.GND CANV_CAN2.4 CANV_CAN2.GND P1.6 P1.GND pad.1 pad.2 pad.3 pad.4 pad.9 R2.2 R3.1 R4.1 R5.1 R6.1 R9.1 U1.2 U2.D5 U2.D7 U2.D8 U2.D9 U2.F2 U2.F6 U2.F7 U2.F8 U2.F9 U2.F10 U2.F12 U2.G2 U2.G6 U2.G7 U2.G8 U2.G9 U2.G10 U2.G12 U2.H6 U2.H7 U2.H8 U2.H9 U2.H10 U2.H12 U2.J6 U2.J7 U2.J8 U2.J9 U2.J10 U2.K6 U2.K7 U2.K8 U2.K9 U2.K10 U2.L4 U2.M1 U2.M8 U2.M9 U2.N1 U3_CAN1.2 U3_CAN1.8 U3_CAN2.2 U3_CAN2.8 U4.2 USB.GND USB.GND1 USB.GND2 USB.GND3 USB.GND4 UWB1.2 UWB1.8 UWB1.16 UWB1.21 UWB1.23 UWB1.24 X1.2 X1.4 | length 63.8
  Component Side w0.254: 17.475,52.875 U3_CAN1.2@18.6,52.875 ; 18.45,58.65 18.507,58.593 18.507,58.082 v1(18.275,57.85) 18.275,57.7 18.557,57.418 18.557,57.15 18.475,57.15 ; U3_CAN1.2@18.925,54.295 v1(18.925,53.575) 18.925,53.2 U3_CAN1.2@18.6,52.875 ; C10.2 19.55,47.5 ; U3_CAN1.8 19.575,51.9 U3_CAN1.2@18.795,52.68 ; C13.2 20.127,56.078 v1(20.226,56.078) ; v1(20.126,46.877) 20.126,46.924 19.55,47.5 ; C3.2 U3_CAN1.2@18.795,52.68 ; v1(21.05,49.725) 20.728,49.403 19.826,49.403 C11.2 19.9,49.273 R9.1 19.9,47.85 19.55,47.5 ; v1(23.1,53) 23.1,52.975 23.425,53.3 U2.D7 ; v1(23.125,51.75) 23.15,51.75 U2.D5 ; U2.D8 23.676,54.226 v1(23.676,54.878) ; U2.D9 v1(23.676,54.878) ; v1(23.676,54.878) v1(23.676,54.878) ; C1.2 24.225,47.225 23.355,46.355 CAN_CAN1.4 23.355,44.65 CAN_CAN1.GND@25.305,42.7 ; C1.2@24.288,47.237 v1@24.55,47.5 ; v1(24.55,47.6) v1@24.55,47.5 ; U2.F2 25.025,49.775 v1(25.025,49.725) U2.G2 ; U2.F6 25.05,52.675 ; U2.F7 v1(25.05,53.65) ; U2.F8 v1(25.05,53.65) ; U2.F9 v1(25.05,54.95) ; U2.F10 v1(25.05,54.95) ; U2.F12 25.025,56.875 v1(25.025,56.9) 25.35,56.575 U2.G12 25.428,56.522 25.972,56.522 U2.H12 ; X1.2@25.028,48.025 25.025,48.025 25.05,48.025 25.075,48.025 X1.2 v1@24.55,47.5 ; v1(25.05,52.175) 25.05,52.675 ; U2.G6 25.05,52.675 ; U2.G7 v1(25.05,53.65) ; U2.G8 v1(25.05,53.65) ; U2.G9 v1(25.05,54.95) ; U2.G10 v1(25.05,54.95) ; U2.H6 26.35,52.675 ; U2.H7 v1(26.35,53.65) ; U2.H8 v1(26.35,53.65) ; U2.H9 v1(26.35,54.95) ; U2.H10 v1(26.35,54.95) ; v1(26.35,52.175) 26.35,52.675 ; X1.4 26.805,47 27.025,47.22 v1(27.025,47.2) ; U2.J6 26.35,52.675 ; U2.J7 v1(26.35,53.65) ; U2.J8 v1(26.35,53.65) ; U2.J9 v1(26.35,54.95) ; U2.J10 v1(26.35,54.95) ; U2.K6 27.65,52.35 v1(27.675,52.375) ; U2.K7 27.325,53.65 ; U2.K8 27.325,53.65 ; U2.K9 27.325,54.675 v1(27.625,54.975) U2.K10 ; v1(27.75,53.65) 27.325,53.65 ; U2.L4 v1(28.275,51.075) ; U2.M1 v1(28.925,49.125) 29.225,49.425 U2.N1 ; U2.M8 28.325,54.275 v1(28.325,54.325) U2.M9 ; v1(29,48.3) 29.25,48.05 C17.2 ; C21.2 30.678,47.225 30.783,47.12 30.855,47.12 31.75,46.225 CAN_CAN2.4 ; v1(30.974,52.801) 32.124,52.801 C12.2@32.146,52.78 ; CANV_CAN2.4 31.75,41.644 CAN_CAN2.4 ; C18.2 v1(32.445,59.08) ; C12.2 C12.2@32.146,52.78 ; C15.2 v1(32.125,55.975) 32.125,56.525 32.7,57.1 U4.2 ; C19.2 32.17,48.855 32.73,48.296 v1(32.73,48.275) ; R2.2 32.5,51.625 32.525,51.65 ; v1(32.3,46.15) 32,45.85 CAN_CAN2.4 ; C14.2 32.525,50.985 32.525,51.65 ; C16_CAN2.1@34.625,54.625 C16_CAN2.1@34.65,54.6 ; C16_CAN2.1@34.65,54.475 C16_CAN2.1@34.65,54.6 ; pad.9@35.574,55.784 34.65,54.86 C16_CAN2.1@34.65,54.6 ; U3_CAN2.8 35.7,50.97 34.745,51.925 34.725,51.925 35.05,52.25 35.05,53.345 34.899,53.496 34.899,54.32 34.914,54.336 C16_CAN2.1@34.65,54.6 ; pad.9@37.175,55.1 37.6,54.675 pad.1@37.632,54.675 ; U3_CAN1.2@18.6,52.875 U3_CAN1.2@18.795,52.68 ; C12.2@32.146,52.78 32.525,52.401 32.525,51.65
  3V3 w0.254: v1@20.126,46.876 v1(20.126,46.877)
  Solder Side w0.254: v1(32.125,55.975) UWB1.2@32.175,56.025 ; v1(32.3,46.15) 32.475,46.325 UWB1.8
  other v1: 39.175,47 39.8,47 38.55,47.625 39.175,47.625 39.8,47.625 36.075,48.2 36.7,48.2 37.325,48.2 38.55,48.25 39.175,48.25 39.8,48.25 36.075,48.825 36.7,48.825 37.325,48.825 38.55,48.875 39.175,48.875 39.8,48.875 36.375,53.225 37,53.225 37.625,53.225 39.85,53.4 38.6,53.425 39.225,53.425 36.375,53.85 37,53.85 37.625,53.85 39.85,54.025 38.6,54.05 39.225,54.05 39.225,54.675 39.85,54.675
NetC1_1: C1.1 U2.G1 X1.3 | length 3.7
  Component Side w0.254: C1.1@24.25,46.675 24.525,46.675 24.795,46.945 24.995,46.945 X1.3 25.675,47.625 25.675,49.125 U2.G1
NetC2_2: C2.2 U2.H1 X1.1 | length 2.5
  Component Side w0.254: U2.H1 26.025,48.375 X1.1 26.455,48.055 C2.2
NetC8_1: C8.1 D2.3 U1.1 U1.3 | length 6.2
  Component Side w0.5: D2.3 13.857,53.843 ; U1.3 14.698,52.345 14.555,52.345 v1(14.075,52.825) 14.075,53.625 13.857,53.843 ; U1.1 14.602,53.843 13.857,53.843
  Solder Side w0.5: v1(14.075,52.825) 14.85,52.05 C8.1
NetC9_1: C9.1 U1.6 | length 0.5
  Component Side w0.254: U1.6 v1(16.547,53.55)
  Solder Side w0.254: C9.1 16.397,53.7 v1(16.547,53.55)
NetC16_CAN1_2: C16_CAN1.2 CAN_CAN1.1 CANV_CAN1.1 F2.1 U3_CAN1.3 | length 25.4
  Component Side w0.254: v1(17.951,55.003) 17.978,54.975 17.978,54.592 U3_CAN1.3
  Component Side w0.5: v1(11.9,48.95) 11.95,48.9 F2.1 ; CAN_CAN1.1 19.751,45.699 19.751,41.737 CANV_CAN1.1
  3V3 w0.254: 13.695,47.93 13.695,48.293 13.695,48.846 v1(15.626,50.777)
  3V3 w0.5: v1(11.9,48.95) 12.249,48.601 13.386,48.601 13.695,48.293 ; 13.695,47.93 13.9,47.725 15.529,47.725 v1(15.702,47.552) 16.331,46.923 17.358,46.923 18.955,45.326 19.443,45.326 19.751,45.018 19.751,44.849 v1(19.975,44.625)
  Signal w0.254: v1(15.626,50.777) 15.626,50.851 17.951,53.176 v1(17.951,55.003)
  Solder Side w0.5: C16_CAN1.2 15.7,47.554 v1(15.702,47.552)
NetC16_CAN2_2: C16_CAN2.2 CAN_CAN2.1 CANV_CAN2.1 F1.1 U3_CAN2.3 | length 34.4
  Component Side w0.254: v1(27.825,47) 27.825,46.02 CAN_CAN2.1 27.995,41.644 CANV_CAN2.1 ; v1(28.375,48.525) 28.625,48.775 28.705,48.775 28.758,48.722 30.402,48.722 30.708,49.028 31.578,49.028 32,49.45 32.131,49.45 33.15,50.469 33.15,52.026 33.802,52.678 33.946,52.678 34.4,53.133 U3_CAN2.3 34.4,53.75 33.65,54.5 C16_CAN2.2
  Component Side w0.5: F1.1 14.425,48.225 v1(14.925,48.725)
  3V3 w0.254: v1(27.825,47) 27.825,47.975 v1(28.375,48.525)
  3V3 w0.5: v1(14.925,48.725) 15.349,48.301 15.805,48.301 16.607,47.499 17.043,47.499 17.351,47.807 17.982,47.176 18.593,47.176 20.551,45.218 20.551,44.607 20.983,44.175 27.325,44.175 v1(27.95,43.55)
NetC21_1: C21.1 R8.1 RST1.1 U2.J1 | length 6.3
  Component Side w0.254: U2.J1 28.45,47.65 RST1.1 28.65,47.225 C21.1 29.52,47.246 29.883,47.608 30.288,47.608 30.358,47.678 30.692,47.678 30.92,47.45 R8.1
NetCAN_CAN1_2: CAN_CAN1.2 CANV_CAN1.2 R15_CAN1.2 U3_CAN1.7 | length 16.4
  Component Side w0.254: v1(18.375,46.65) 18.375,47.9 18.925,48.45 U3_CAN1.7 ; CAN_CAN1.2 20.845,41.67 CANV_CAN1.2 ; CAN_CAN1.2@20.865,45.515 CAN_CAN1.2@20.865,45.85
  Signal w0.254: v1(18.375,46.65) 18.375,44.2 20.023,42.552 v1(20.801,42.552)
  Solder Side w0.254: R15_CAN1.2 17.742,47.283 v1(18.375,46.65)
NetCAN_CAN1_3: CAN_CAN1.3 CANV_CAN1.3 JMP_CAN1.1 U3_CAN1.6 | length 17.3
  Component Side w0.254: v1(17.85,49.475) 17.886,49.475 18.377,49.966 18.377,51.353 U3_CAN1.6 ; v1(21.575,43.15) 21.75,43.325 22.105,43.325 ; CAN_CAN1.3 22.105,43.325 ; CANV_CAN1.3 22.105,41.67 22.105,43.325
  Signal w0.254: v1(17.85,49.475) 17.85,48.175 19.225,46.8 v1(19.225,44.8) 20.875,43.15 v1(21.575,43.15)
  Solder Side w0.254: JMP_CAN1.1 19.25,43 19.225,43.025 v1(19.225,44.8)
NetCAN_CAN2_2: CAN_CAN2.2 CANV_CAN2.2 R15_CAN2.2 U3_CAN2.7 | length 17.3
  Component Side w0.254: CAN_CAN2.2 29.223,45.833 29.223,43.725 ; CANV_CAN2.2 29.223,41.666 29.223,43.725 ; v1(29.624,42.669) 29.624,43.324 29.223,43.725 ; v1(33.877,46.627) 33.858,46.646 33.858,47.004 33.492,47.37 33.492,48.53 33.611,48.649 34.366,48.649 R15_CAN2.2 ; R15_CAN2.2@35.05,49.208 U3_CAN2.7
  Signal w0.254: v1(29.624,42.669) 29.624,43.299 30.1,43.775 31.4,43.775 33.667,46.042 33.667,46.442 v1@33.877,46.652 ; v1(33.877,46.627) v1@33.877,46.652 ; 34.045,46.82 v1@33.877,46.652
NetCAN_CAN2_3: CAN_CAN2.3 CANV_CAN2.3 JMP_CAN2.1 U3_CAN2.6 | length 15.3
  Component Side w0.254: CAN_CAN2.3@30.5,45.6 CAN_CAN2.3 30.472,45.822 30.472,43.023 30.628,42.867 30.628,42.533 31.108,42.533 v1(31.175,42.6) ; JMP_CAN2.1 34.4,49.6 U3_CAN2.6 ; U3_CAN2.6@34.425,50.8 34.425,50.604 v1(34.448,50.581)
  Signal w0.254: v1(31.175,42.6) 33.997,45.422 33.997,46.177 34.448,46.629 v1(34.448,50.581)
NetD2_1: D2.1 F2.2 | length 0.9
  Component Side w0.5: D2.1 11.95,51.7 F2.2
NetD2_2: D2.2 F1.2 | length 1
  Component Side w0.5: D2.2 14.425,51.14 F1.2
NetJMP_CAN1_2: JMP_CAN1.2 R15_CAN1.1 | length 7
  Signal w0.254: v1(16.787,46.396) 17.775,45.408 17.775,44.3 18.01,44.065 18.025,44.065 18.59,43.5 18.59,43.485 18.65,43.425 v1(18.65,41.875)
  Solder Side w0.254: v1(16.787,46.396) 16.954,46.396 17.4,45.95 R15_CAN1.1 ; v1(18.65,41.875) 18.692,41.917 JMP_CAN1.2
NetJMP_CAN2_2: JMP_CAN2.2 R15_CAN2.1 | length 0.5
  Component Side w0.254: 34.4,48.192 34.408,48.2 R15_CAN2.1
NetLED1_A: LED1.A UWB1.12 | length 2
  Solder Side w0.254: UWB1.12 26.675,43.912 LED1.A@27.175,43.412
NetLED1_C: LED1.C R3.2 | length 1.2
  Solder Side w0.254: LED1.C 28.267,41.7 28.317,41.65
NetLED2_A: LED2.A UWB1.13 | length 2.4
  Solder Side w0.254: LED2.A@24.1,43.212 25.275,44.387 UWB1.13
NetLED2_C: LED2.C R4.2 | length 7.3
  Solder Side w0.254: LED2.C@24.1,41.7 24.158,41.758 26.184,41.758 26.691,42.266 30.361,42.266 30.402,42.307 30.542,42.307 R4.2@30.542,41.675
NetLED3_A: LED3.A UWB1.14 | length 3
  Solder Side w0.254: LED3.A@22.2,43.05 22.563,43.05 23.875,44.362 UWB1.14
NetLED3_C: LED3.C R5.2 | length 7.8
  Signal w0.254: v1(22.751,42.177) 22.968,41.96 27.619,41.96 v1(28.642,42.708)
  Solder Side w0.254: LED3.C@22.006,41.581 22.602,42.177 v1(22.751,42.177) ; v1(28.642,42.708) R5.2@28.642,43.275
NetLED4_A: LED4.A UWB1.15 | length 2.9
  Solder Side w0.254: LED4.A@20.875,43.2 21.325,43.65 21.813,43.65 22.475,44.312 UWB1.15
NetLED4_C: LED4.C R6.2 | length 11.6
  Signal w0.254: v1(21.525,42.575) 22.534,41.566 29.091,41.566 v1(30.225,42.7)
  Solder Side w0.254: LED4.C 21.525,42.45 v1(21.525,42.575) ; v1(30.225,42.7) 30.492,42.967 R6.2
NetU2_B12: U2.B12 U3_CAN1.4 | length 6.9
  Component Side w0.254: U3_CAN1.4 17.522,54.398 17.522,55.7 17.806,55.984 18.14,55.984 18.224,55.9 19.625,55.9 19.717,55.992 19.717,56.302 19.883,56.468 20.046,56.468 20.059,56.481 21.14,56.481 21.349,56.272 21.601,56.272 21.778,56.449 21.778,56.549 21.804,56.575 U2.B12
NetU2_C12: U2.C12 U3_CAN1.1 | length 7.8
  Component Side w0.254: v1(17.973,55.581) 18.079,55.475 19.125,55.475 19.575,55.025 U3_CAN1.1 ; v1(22.475,56.3) 22.5,56.3 U2.C12
  Signal w0.254: v1(17.973,55.581) 20.299,55.581 20.747,56.028 22.203,56.028 v1(22.475,56.3)
OTG_FS_N: U2.C15 U4.6 | length 9.7
  Component Side w0.15: U2.C15 v1(23.075,58.225) ; v1(30.875,56.85) 31.125,56.6 U4.6
  3V3 w0.15: v1(23.075,58.225) 23.83,57.47 30.255,57.47 v1(30.875,56.85)
OTG_FS_P: U2.B15 U4.4 | length 10.4
  Component Side w0.15: U2.B15 22.15,58.525 v1(22.454,58.221) ; v1(30.827,57.553) 30.854,57.525 31.606,57.525 U4.4
  3V3 w0.15: v1(22.454,58.221) 22.454,58.175 22.908,58.629 23.242,58.629 23.998,57.874 30.451,57.874 30.772,57.553 v1(30.827,57.553)
PB2-BOOT1: R2.1 U2.M6 | length 3.6
  Component Side w0.254: U2.M6 28.972,52.328 28.972,51.899 29.149,51.722 R2.1@31.62,51.722
RSTn: U2.D1 UWB1.3 | length 11.4
  Component Side w0.254: v1(23.425,48.975) U2.D1
  Signal w0.254: v1(23.425,48.975) 23.427,48.975 25.099,50.647 25.392,50.647 26.753,52.008 26.753,52.023 29.277,54.547 29.458,54.547 31.042,54.547 31.07,54.575 v1(32,54.575)
SERIAL5_RX: P1.3 U2.B11 | length 11.3
  Component Side w0.254: v1(21.825,55.625) U2.B11
  Signal w0.254: v1(13.151,50.352) 16.477,50.352 16.48,50.35 21.755,55.625 v1(21.825,55.625)
SERIAL5_TX: P1.2 U2.C11 | length 12.5
  Component Side w0.254: v1(22.45,55.6) U2.C11
  Signal w0.254: v1(13.182,49.55) 16.82,49.55 17.678,50.408 17.678,50.828 v1(22.45,55.6)
  Solder Side w0.254: P1.2 v1(13.182,49.55)
U\W\B\_\C\S\: U2.E1 UWB1.17 | length 5.7
  Component Side w0.254: v1(24.05,48.675) 24.075,48.7 U2.E1
  Solder Side w0.254: UWB1.17 21.268,47.675 21.621,48.028 23.403,48.028 v1(24.05,48.675)
USB_N: U4.3 USB.D- | length 8.1
  Component Side w0.15: U4.3 33.625,57.608 33.625,56.146 33.869,55.903 34.144,55.903 34.38,55.666 34.38,55.206 v1(34.302,55.128)
  3V3 w0.15: v1(34.302,55.128) 34.302,53.552 36.368,51.486 v1(36.381,51.498)
USB_P: U4.1 USB.D+ | length 8.1
  Component Side w0.15: U4.1 33.05,56 33.551,55.499 v1(33.976,55.499)
  3V3 w0.15: v1(33.976,55.499) 33.976,55.373 33.921,55.317 33.921,53.362 33.976,53.307 33.976,52.124 35.273,50.827 v1(36.127,50.827)
  Solder Side w0.15: v1(36.127,50.827) 36.371,50.827 USB.D+
UWB_IRQ: U2.F1 UWB1.22 | length 9.8
  Component Side w0.254: v1(23.75,49.868) 23.863,49.755 24.212,49.755 24.405,49.562 24.622,49.562 24.622,49.558 24.725,49.455 U2.F1
  Signal w0.254: v1(22.351,54.303) 22.454,54.2 22.924,54.2 24.153,52.971 24.153,50.271 v1(23.75,49.868)
  Solder Side w0.254: UWB1.22 20.825,54.675 21.197,54.303 v1(22.351,54.303)
UWB_MISO: U2.B2 UWB1.19 | length 3.4
  Component Side w0.254: U2.B2 22.425,50.375 v1(22.425,50.4)
  Solder Side w0.254: UWB1.19 22.35,50.475 v1(22.425,50.4)
UWB_MOSI: U2.B3 UWB1.18 | length 4.6
  Component Side w0.254: U2.B3 22.125,50.75 v1(22.45,51.075)
  Signal w0.254: v1(20.625,49) 20.813,49 21.135,49.322 21.217,49.322 21.453,49.558 21.453,50.078 v1(22.45,51.075)
  Solder Side w0.254: UWB1.18 UWB1.18@20.625,49.075
UWB_PHA: U2.A1 UWB1.9 | length 12.2
  Component Side w0.254: v1(21.451,48.577) 21.451,49.401 U2.A1
  Signal w0.254: v1(21.451,48.577) 21.53,48.577 22.942,47.166 22.942,46.946 25.514,44.374 30.849,44.374 v1(30.875,44.4)
UWB_POL: U2.B1 UWB1.10 | length 10.6
  Component Side w0.254: v1(22.125,48.675) U2.B1
  Signal w0.254: v1(22.125,48.675) 23.272,47.528 23.272,47.083 25.48,44.875 29.529,44.875 v1(29.626,44.777)
  Solder Side w0.254: UWB1.10 29.475,44.929 v1(29.626,44.777)
UWB_SCK: U2.A2 UWB1.20 | length 4.2
  Component Side w0.254: U2.A2 21.475,50.396 21.501,50.422 21.601,50.422 21.778,50.599 21.778,51.602 21.775,51.605 v1(21.775,51.7)
  Solder Side w0.254: UWB1.20 19.65,51.7 v1(21.775,51.7)
VBAT: R7.1 U2.C1 | length 1.5
  Component Side w0.254: U2.C1 22.775,47.95 R7.1
VBUS: U2.E15 U4.5 USB.VBUS | length 19.5
  Component Side w0.254: U2.E15 v1(24.375,58.225) ; v1(30.843,58.257) 31.136,57.964 32.002,57.964 32.121,57.845 32.121,57.296 31.925,57.1 U4.5
  3V3 w0.254: v1(24.375,58.225) 24.407,58.257 v1(30.843,58.257) 33.643,58.257 33.85,58.05 33.85,56.369 33.997,56.222 33.997,56.048 34.775,55.27 34.775,53.764 v1(36.389,52.15)
  Solder Side w0.254: USB.VBUS v1(36.389,52.15)
VCAP_1: C20.1 U2.M10 | length 9.7
  Component Side w0.254: 19.875,57.15 21.121,57.15 21.349,56.922 23.553,56.922 23.772,56.703 23.772,56.449 24.296,55.925 27.975,55.925 U2.M10
VCAP_2: C22.2 U2.F13 | length 5.5
  Component Side w0.254: 19.85,58.65 20.972,57.528 24.201,57.528 24.378,57.351 24.378,57.251 24.404,57.225 U2.F13
VDD_3V3: 3V3.1 C3.1 C4.1 C5.2 C6.1 C7.1 C10.1 C11.1 C12.1 C13.1 C14.1 C15.1 C17.1 C18.1 C19.1 P1.1 R7.2 R8.2 U1.4 U2.C5 U2.C6 U2.C7 U2.C8 U2.C9 U2.F3 U2.G3 U2.G13 U2.H13 U2.J12 U2.J13 U2.K4 U2.N8 U2.N9 U2.N10 U2.P1 U2.R1 U3_CAN1.5 U3_CAN2.5 UWB1.5 UWB1.6 UWB1.7 | length 40.7
  Component Side w0.254: C4.1 16.567,54.428 16.567,54.025 v1(17.025,54.025) ; v1(16.825,48.025) 17.075,48.025 C10.1 ; C11.1 17.275,49.775 v1(17.275,50.575) 17.625,50.925 U3_CAN1.5 ; C13.1 21.07,55.545 v1(21.125,55.6) ; C3.1 20.745,52.12 v1(21.025,52.4) ; U2.C5 23.075,52.325 22.775,52.625 U2.C6 ; U2.C7 22.978,53.528 v1(23.026,53.528) 23.026,53.576 23.062,53.612 23.062,53.688 U2.C8 ; U2.C9 23.075,54.925 v1(23.1,54.925) ; v1(23.675,47.25) 23.675,47.742 R7.2 ; U2.F3 25.025,51.025 25.075,51.025 U2.G3 ; U2.G13 25.425,57.225 v1(25.725,56.925) U2.H13 ; U2.J12 26.675,56.65 v1(26.375,56.95) 26.65,57.225 U2.J13 ; v1(27,51.05) U2.K4 ; U2.N8 29.444,54.144 v1(29.55,54.144) ; U2.N9 29.6,54.95 U2.N10 ; v1(29.625,49.725) U2.P1 ; C17.1 29.957,48.102 v1(30.401,48.102) ; U2.R1 30.875,49.725 v1(30.875,49.75) 31.325,50.2 C14.1 ; v1(30.875,48.625) 31.799,48.625 32.129,48.295 C19.1 ; v1(30.875,54.95) 30.995,55.07 C15.1 ; v1(30.925,52.325) 31.03,52.22 C12.1 ; v1(31.4,58.775) 31.655,58.52 C18.1 ; R8.2 32.608,47.217 33.052,46.773 v1(33.052,46.627) ; v1(33.125,49.7) 33.75,50.325 U3_CAN2.5
  Component Side w0.5: U1.4 17.275,51.629 v1(17.275,50.575)
  Solder Side w0.254: v1(13.168,48.075) 13.175,48.082 P1.1 ; v1@16.75,48.025 v1(16.825,48.025) ; v1(30.875,48.625) 31.325,49.075 UWB1.7 v1@33.112,49.713 ; v1(30.875,49.75) 31.6,50.475 UWB1.6 34.025,50.475 ; v1(30.925,52.325) 31.375,51.875 UWB1.5 33.62,51.875 C6.1 34.045,50.755 34.025,50.735 34.025,50.475 ; v1@33.175,49.775 33.525,50.125 C7.1 ; v1(35.475,48.775) 35.35,48.775 35.1,49.025 C5.2 34.045,49.605 34.045,49.635 34.022,49.658 34.022,50.102 C7.1 ; 34.025,50.475 34.045,50.455 C7.1
  other v1: 25.025,51.05 22.87,52.556 29.625,54.95
pads on no net: U1.5 U2.A3 U2.A4 U2.A5 U2.A6 U2.A7 U2.A8 U2.A9 U2.A10 U2.A11 U2.A12 U2.A13 U2.B4 U2.B5 U2.B7 U2.B8 U2.B9 U2.B10 U2.B13 U2.B14 U2.C2 U2.C3 U2.C4 U2.C10 U2.C13 U2.C14 U2.D2 U2.D3 U2.D4 U2.D10 U2.D11 U2.D12 U2.D13 U2.D14 U2.D15 U2.E2 U2.E3 U2.E4 U2.E12 U2.E13 U2.E14 U2.F4 U2.F14 U2.F15 U2.G4 U2.G14 U2.G15 U2.H2 U2.H3 U2.H4 U2.H14 U2.H15 U2.J2 U2.J3 U2.J4 U2.J14 U2.J15 U2.K1 U2.K2 U2.K3 U2.K12 U2.K13 U2.K14 U2.K15 U2.L1 U2.L2 U2.L3 U2.L12 U2.L13 U2.L14 U2.L15 U2.M2 U2.M3 U2.M4 U2.M5 U2.M7 U2.M11 U2.M12 U2.M13 U2.M14 U2.M15 U2.N2 U2.N3 U2.N4 U2.N5 U2.N6 U2.N7 U2.N11 U2.N12 U2.N13 U2.N14 U2.N15 U2.P2 U2.P3 U2.P4 U2.P5 U2.P6 U2.P7 U2.P8 U2.P9 U2.P10 U2.P11 U2.P13 U2.P14 U2.P15 U2.R2 U2.R3 U2.R4 U2.R5 U2.R6 U2.R7 U2.R8 U2.R9 U2.R10 U2.R11 U2.R12 U2.R13 U2.R14 U2.R15 USB.GND5 USB.GND6 USB.ID UWB1.1 UWB1.4 UWB1.11

## Polygon pours and split planes (outlines as drawn)
GND_MCU on Solder Side "GND_MCU_L04_P055" (solid, remove dead copper, pour order 55): 10.7,60.581 17.95,60.581 17.95,59.45 33.975,59.45 33.975,60.519 40.7,60.519 40.7,40.85 10.7,40.85
VDD_3V3 on 3V3 "VDD_3V3_L02_P053" (solid, remove dead copper, pour order 53): 10.75,60.581 10.7,60.531 10.7,40.85 40.7,40.85 40.7,60.519 33.975,60.519 33.975,59.45 17.95,59.45 17.95,60.581
GND_MCU on Signal "GND_MCU_L03_P057" (solid, remove dead copper, pour order 57): 10.7,60.581 17.85,60.581 17.85,59.55 17.95,59.45 33.975,59.45 33.975,60.519 40.7,60.519 40.7,40.85 10.7,40.85
GND_MCU on Component Side "GND_MCU_L01_P059" (solid, remove dead copper, pour order 59): 10.7,60.581 17.95,60.581 17.95,59.45 33.975,59.45 33.975,60.519 40.7,60.519 40.7,40.85 10.7,40.85

## Keep-outs
Keep-Out Layer:
  lines w0.1: 10.7,40.85 10.7,60.581 17.95,60.581 17.95,59.45 33.975,59.45 33.975,60.519 40.7,60.519 40.7,40.85

## Silkscreen, mask and mechanical layers (free items; w line width, h text height)
Top Overlay:
  region: 38.2,52.7 39.409,49.214 40.338,47.805 40.16,49.416 39.419,54.529
  lines w0.013: 38.642,48.421 40.307,47.748 ; 38.642,48.421 39.387,49.143 ; 38.642,48.421 40.307,47.748 ; 38.642,48.421 39.387,49.143 ; 39.387,49.143 40.307,47.748 ; 39.387,49.143 40.307,47.748 ; 38.2,52.7 39.409,49.214 40.338,47.805 40.16,49.416 39.419,54.529 38.2,52.7
Bottom Overlay:
  drawing of 1215 lines, arcs and shapes, not listed
Dimension:
  the board outline again, w0.1
tCAD:
  drawing of 196 lines, arcs and shapes, not listed
  text "Layer" at 72.076,125.395 h1
  text "Name" at 76.258,125.395 h1
  text "Material" at 84.832,125.395 h1
  text "Thickness" at 92.099,125.395 h1
  text "Constant" at 98.067,125.395 h1
  text "Board Layer Stack" at 103.593,125.395 h1
  text "1" at 72.076,123.395 h1
  text "Top Overlay" at 76.258,123.395 h1
  text "2" at 72.076,121.395 h1
  text "Top Solder" at 76.258,121.395 h1
  text "Solder Resist" at 84.832,121.395 h1
  text "0.010mm" at 92.099,121.395 h1
  text "3.5" at 98.067,121.395 h1
  text "3" at 72.076,119.395 h1
  text "Component Side" at 76.258,119.395 h1
  text "Copper" at 84.832,119.395 h1
  text "0.036mm" at 92.099,119.395 h1
  text "4" at 72.076,117.395 h1
  text "Dielectric 1" at 76.258,117.395 h1
  text "FR-4" at 84.832,117.395 h1
  text "1.000mm" at 92.099,117.395 h1
  text "4.2" at 98.067,117.395 h1
  text "5" at 72.076,115.395 h1
  text "3V3" at 76.258,115.395 h1
  text "Copper" at 84.832,115.395 h1
  text "0.036mm" at 92.099,115.395 h1
  text "6" at 72.076,113.395 h1
  text "Dielectric2" at 76.258,113.395 h1
  text "FR-4" at 84.832,113.395 h1
  text "0.320mm" at 92.099,113.395 h1
  text "4.8" at 98.067,113.395 h1
  text "7" at 72.076,111.395 h1
  text "Signal" at 76.258,111.395 h1
  text "Copper" at 84.832,111.395 h1
  text "0.035mm" at 92.099,111.395 h1
  text "8" at 72.076,109.395 h1
  text "Dielectric3" at 76.258,109.395 h1
  text "FR-4" at 84.832,109.395 h1
  text "0.320mm" at 92.099,109.395 h1
  text "4.8" at 98.067,109.395 h1
  text "9" at 72.076,107.395 h1
  text "Solder Side" at 76.258,107.395 h1
  text "Copper" at 84.832,107.395 h1
  text "0.036mm" at 92.099,107.395 h1
  text "10" at 72.076,105.395 h1
  text "Bottom Solder" at 76.258,105.395 h1
  text "Solder Resist" at 84.832,105.395 h1
  text "0.010mm" at 92.099,105.395 h1
  text "3.5" at 98.067,105.395 h1
  text "11" at 72.076,103.395 h1
  text "Bottom Overlay" at 76.258,103.395 h1
Drill Drawing:
  circle w0.254: c-43.781,371.835 r0.46
  lines w0.254: -44.241,365.399 -44.011,365.399 -43.781,365.17 -43.551,365.399 -43.322,365.399 -43.551,365.629 -43.322,365.859 -43.551,365.859 -43.781,366.089 -44.011,365.859 -44.241,365.859 -44.011,365.629 -44.241,365.399 ; -44.241,368.158 -43.322,368.158 -43.781,367.238 -44.241,368.158 ; -44.241,369.307 -43.322,369.307 -43.322,370.226 -44.241,370.226 -44.241,369.307
  lines w0.381: -45.102,364.549 61.804,364.549 ; -45.102,372.824 61.804,372.824 ; -39.795,362.48 -39.795,374.892 ; -34.988,362.48 -34.988,374.892 ; -25.374,362.48 -25.374,374.892 ; -21.259,362.48 -21.259,374.892 ; -15.27,362.48 -15.27,374.892 ; -2.041,362.48 -2.041,374.892 ; 2.866,362.48 2.866,374.892 ; 11.899,362.48 11.899,374.892 ; 17.533,362.48 17.533,374.892 ; 23.972,362.48 23.972,374.892 ; 33.982,362.48 33.982,374.892 ; 43.723,362.48 43.723,374.892 ; 50.577,362.48 50.577,374.892 ; -45.102,362.48 61.804,362.48 61.804,374.892 -45.102,374.892 -45.102,362.48
  text "Symbol" at -43.861,373.444 h1.2
  text "Count" at -39.174,373.444 h1.2
  text "Hole Size" at -34.367,373.444 h1.2
  text "Plated" at -24.753,373.444 h1.2
  text "Hole Type" at -20.638,373.444 h1.2
  text "Drill Layer Pair" at -14.65,373.444 h1.2
  text "Via/Pad" at -1.42,373.444 h1.2
  text "Pad Shape" at 3.487,373.444 h1.2
  text "Template" at 12.52,373.444 h1.2
  text "Description" at 18.153,373.444 h1.2
  text "Hole Tolerance (+)" at 24.592,373.444 h1.2
  text "Hole Tolerance (-)" at 34.602,373.444 h1.2
  text "Hole Length" at 44.344,373.444 h1.2
  text "Routed Path Length" at 51.198,373.444 h1.2
  text "4" at -39.174,371.376 h1
  text "3.000mm (118.11mil)" at -34.367,371.376 h1
  text "PTH" at -24.753,371.376 h1
  text "Round" at -20.638,371.376 h1
  text "Component Side - Solder Side" at -14.65,371.376 h1
  text "Pad" at -1.42,371.376 h1
  text "Rounded" at 3.487,371.376 h1
  text "c600h300" at 12.52,371.376 h1
  text "-" at 44.344,371.376 h1
  text "-" at 51.198,371.376 h1
  text "5" at -39.174,369.307 h1
  text "0.500mm (19.69mil)" at -34.367,369.307 h1
  text "PTH" at -24.753,369.307 h1
  text "Round" at -20.638,369.307 h1
  text "Component Side - Solder Side" at -14.65,369.307 h1
  text "Pad" at -1.42,369.307 h1
  text "Rounded Rectangle" at 3.487,369.307 h1
  text "(Mixed)" at 12.52,369.307 h1
  text "-" at 44.344,369.307 h1
  text "-" at 51.198,369.307 h1
  text "35" at -39.174,367.238 h1
  text "0.762mm (30.00mil)" at -34.367,367.238 h1
  text "PTH" at -24.753,367.238 h1
  text "Round" at -20.638,367.238 h1
  text "Component Side - Solder Side" at -14.65,367.238 h1
  text "Pad" at -1.42,367.238 h1
  text "Rounded" at 3.487,367.238 h1
  text "(Mixed)" at 12.52,367.238 h1
  text "-" at 44.344,367.238 h1
  text "-" at 51.198,367.238 h1
  text "150" at -39.174,365.17 h1
  text "0.200mm (7.87mil)" at -34.367,365.17 h1
  text "PTH" at -24.753,365.17 h1
  text "Round" at -20.638,365.17 h1
  text "Component Side - Solder Side" at -14.65,365.17 h1
  text "Via" at -1.42,365.17 h1
  text "Rounded" at 3.487,365.17 h1
  text "(Mixed)" at 12.52,365.17 h1
  text "-" at 44.344,365.17 h1
  text "-" at 51.198,365.17 h1
  text "194 Total" at -39.174,363.101 h1

## Dimensions
14.2,57.375 to 14.2,44.35 on Bottom Overlay
14.2,57.375 to 37.2,57.375 on Bottom Overlay